# Altium PCB daboard.PcbDoc (part 2 of 2)
Units mil, origin at the board's own origin, x right, y up, seen from the top; angles counter-clockwise.
Board outline 3875 x 2400 mil, 2 copper layers (Top Layer, Bottom Layer); 197 components, 182 nets, 856 pads, 128 vias.
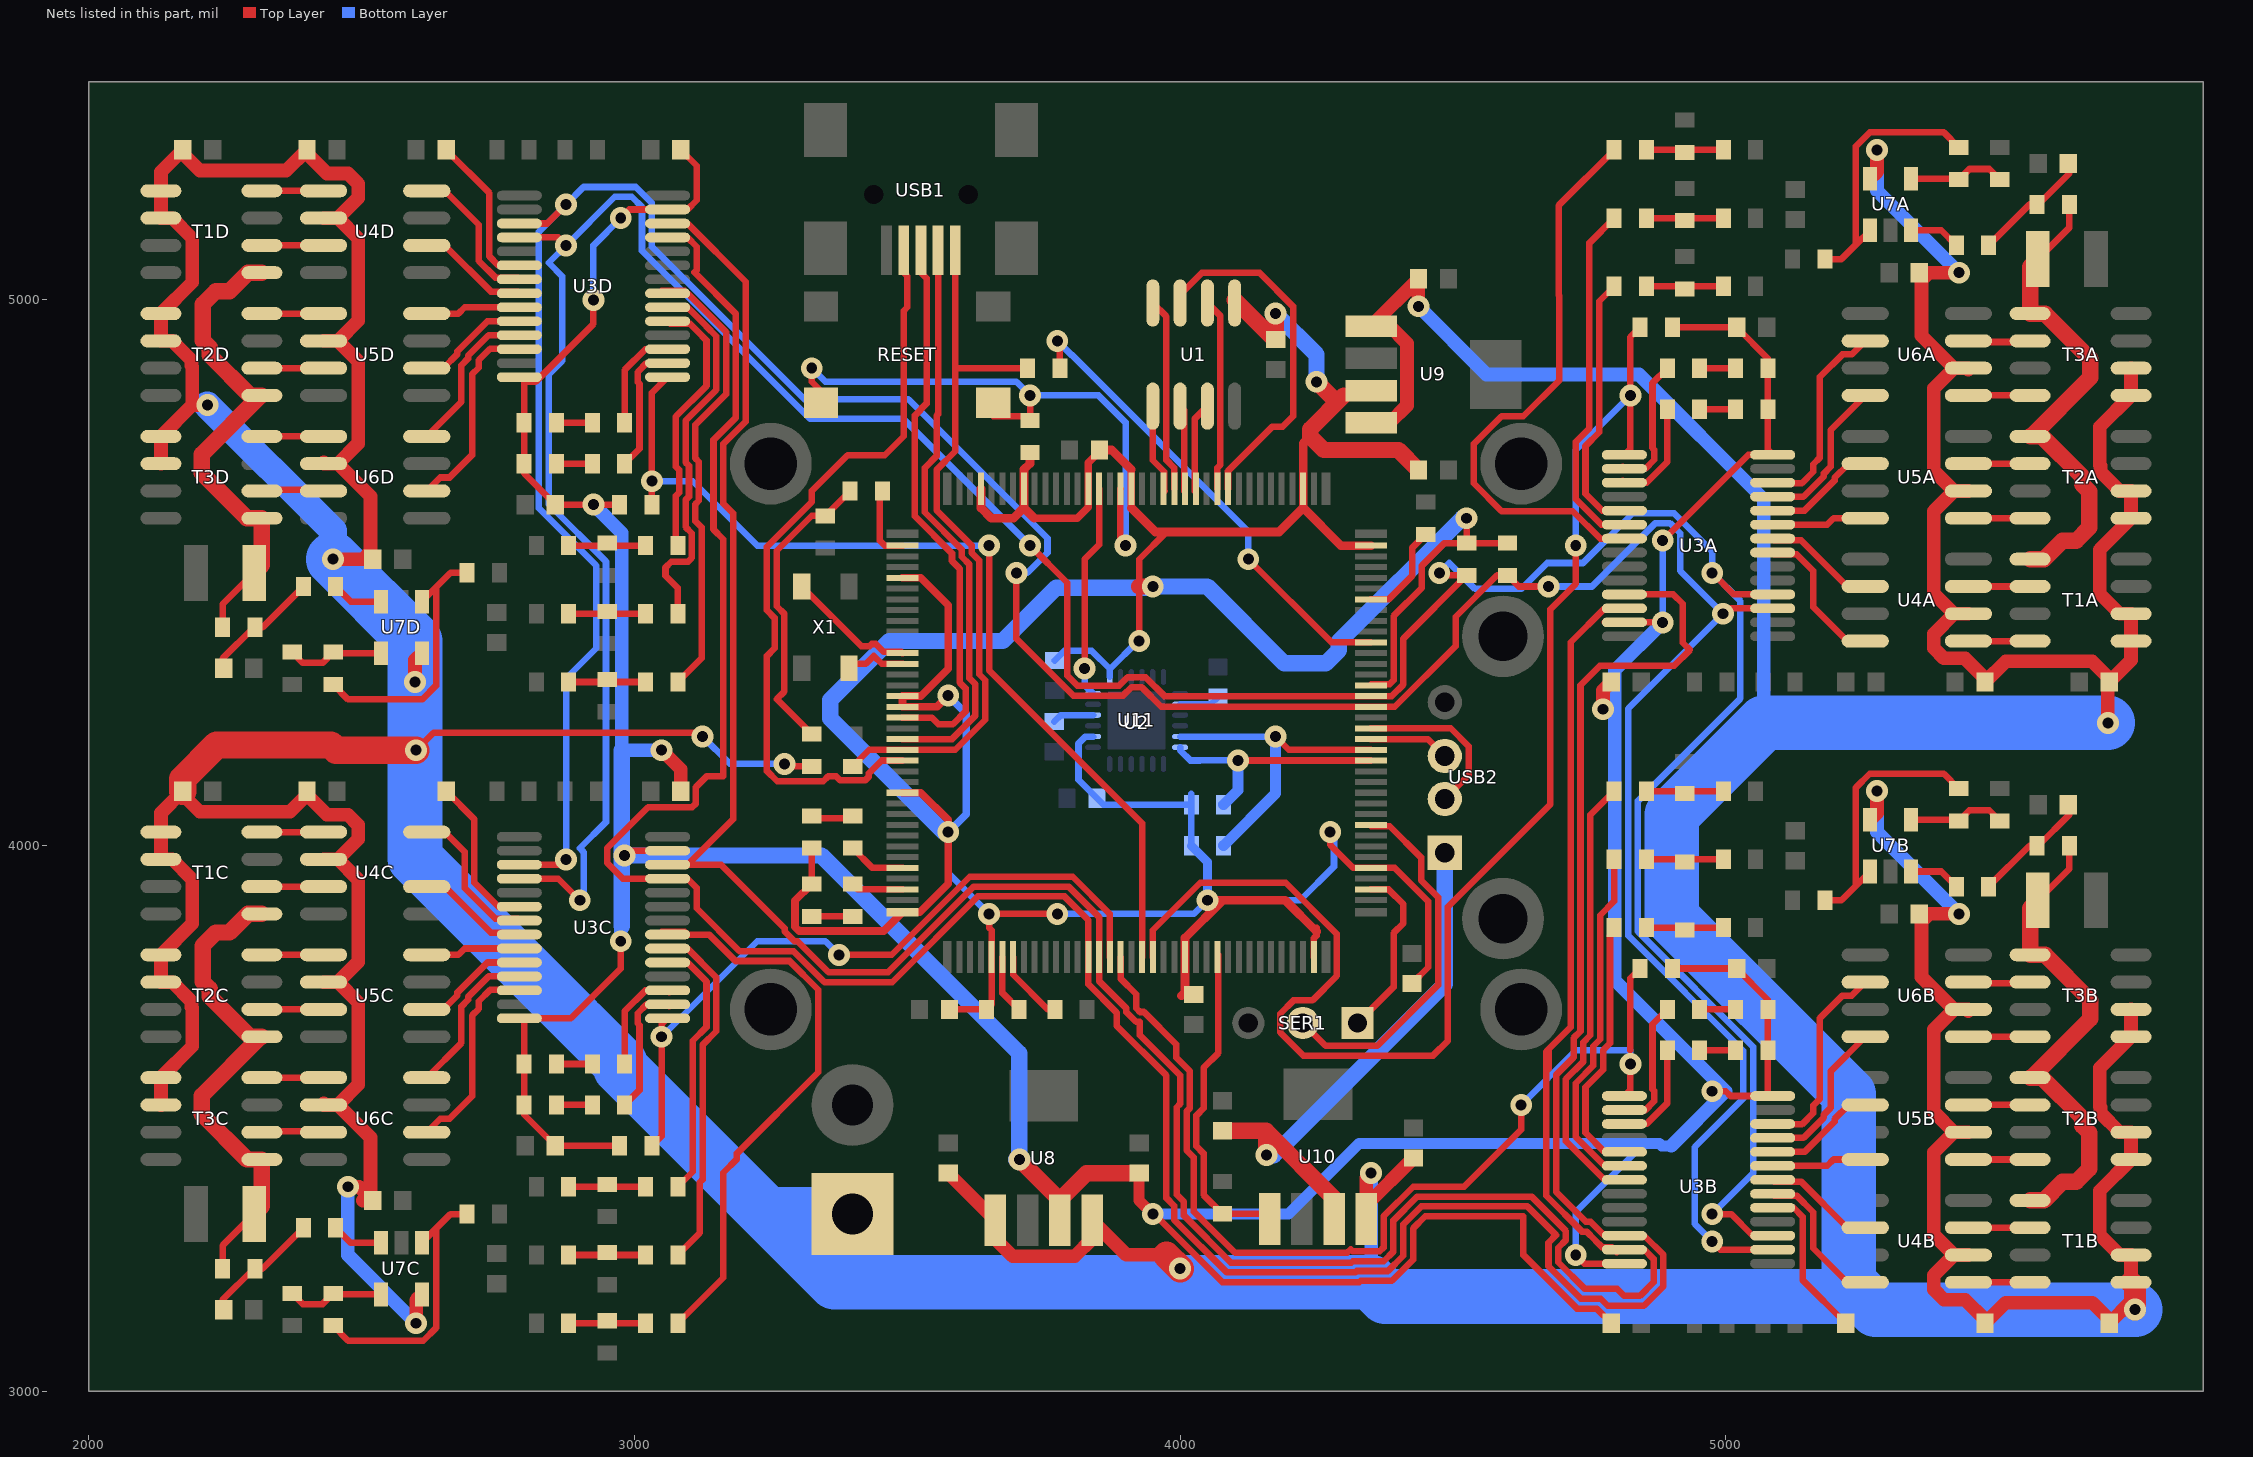
[diagram p2: the nets of this part, all layers, seen from the top]

## Via types
v1: diameter 40, hole 20, Top Layer to Bottom Layer, 127 vias
v2: diameter 50, hole 28, Top Layer to Bottom Layer, 1 vias

## Nets (pads, with @x,y where several pads share a name; then routed paths per layer and width w, separated by ;. In a path a pad name is that pad's centre, name@x,y a point inside that pad or via, vN(x,y) a via of type N, cw(c..) or ccw(c..) an arc to the next point about the centre after c; other vN are vias at no path point) (continued)
NetC2B_2: C2B.2 U3B.20 | length 289.7
  Top Layer w12: U3B.20@5085.83,3336.61 5124.34,3336.61 5140.66,3320.28 5140.66,3204.22 C2B.2@5219.88,3125
NetC2C_2: C2C.2 U3C.20 | length 289.7
  Top Layer w12: C2C.2@2655.12,4100 2707,4048.12 2707,3932.05 2750.66,3888.39 U3C.20@2789.17,3888.39
NetC2D_2: C2D.2 U3D.20 | length 289.7
  Top Layer w12: C2D.2@2655.12,5275 2734.34,5195.78 2734.34,5079.71 2750.67,5063.39 U3D.20@2789.17,5063.39
NetC11A_2: C11A.2 R26A.2 R28A.1 | length 220.7
  Top Layer w12: R28A.1@5481.5,5100 5556.5,5175 5572.44,5175 5629.53,5232.09 C11A.2@5629.53,5250
NetC11B_2: C11B.2 R26B.2 R28B.1 | length 220.7
  Top Layer w12: R28B.1@5481.5,3925 5556.5,4000 5572.44,4000 5629.53,4057.09 C11B.2@5629.53,4075
NetC11C_2: C11C.2 R26C.2 R28C.1 | length 220.7
  Top Layer w12: C11C.2@2245.47,3150 2245.47,3167.91 2302.56,3225 2318.5,3225 R28C.1@2393.5,3300
NetC11D_2: C11D.2 R26D.2 R28D.1 | length 220.7
  Top Layer w12: C11D.2@2245.47,4325 2245.47,4342.91 2302.56,4400 2318.51,4400 R28D.1@2393.51,4475
NetC24_2: C24.2 U11.10 | length 76
  Bottom Layer w12: C24.2@3769.49,4227.36 3781.5,4239.37 U11.10@3840.55,4239.37
NetC26_1: C26.1 U11.20 | length 75
  Bottom Layer w12: U11.20@4000,4259.05 4056.3,4259.05 C26.1@4069.49,4272.24
NetD1_2: D1.2 R2.1 | length 70.5
  Top Layer w12: D1.2@3329.53,4050 R2.1@3400,4050
NetD2_2: D2.2 R3.1 | length 75
  Top Layer w12: D2.2@3325,3870.47 R3.1@3400,3870.47
NetD3A_2: D3A.2 R14A.1 | length 65.9
  Top Layer w12: R14A.1@4951.97,4800 D3A.2@5017.92,4800
NetD3B_2: D3B.2 R14B.1 | length 65.9
  Top Layer w12: R14B.1@4951.97,3625 D3B.2@5017.91,3625
NetD3C_2: D3C.2 R14C.1 | length 65.9
  Top Layer w12: D3C.2@2857.09,3600 R14C.1@2923.03,3600
NetD3D_2: D3D.2 R14D.1 | length 65.9
  Top Layer w12: D3D.2@2857.09,4775 R14D.1@2923.03,4775
NetD4A_2: D4A.2 R15A.1 | length 65.9
  Top Layer w12: R15A.1@4951.97,4875 D4A.2@5017.92,4875
NetD4B_2: D4B.2 R15B.1 | length 65.9
  Top Layer w12: R15B.1@4951.97,3700 D4B.2@5017.91,3700
NetD4C_2: D4C.2 R15C.1 | length 65.9
  Top Layer w12: D4C.2@2857.09,3525 R15C.1@2923.03,3525
NetD4D_2: D4D.2 R15D.1 | length 65.9
  Top Layer w12: D4D.2@2857.09,4700 R15D.1@2923.03,4700
NetR2_2: R2.2 U2.32 | length 106.3
  Top Layer w12: R2.2@3400,3995.47 3436.22,3959.25 U2.32@3491.34,3959.25
NetR3_2: R3.2 U2.34 | length 95.3
  Top Layer w12: R3.2@3400,3929.53 3409.65,3919.88 U2.34@3491.34,3919.88
NetR4_2: R4.2 U2.98 | length 885.1
  Top Layer w12: v1(3775,4925) 3779.53,4920.47 R4.2@3779.53,4875 ; v1(4125,4525) 4277.36,4372.64 U2.98@4349.61,4372.64
  Bottom Layer w12: v1(3775,4925) 3800,4900 3800.91,4900 4125,4575.91 v1(4125,4525)
NetR5_2: R5.2 U2.102 | length 179.6
  Top Layer w12: U2.102@4349.61,4451.38 4381.93,4451.38 4425,4494.45 4425,4545.47 R5.2@4450,4570.47
NetR6_2: R6.2 R7.1 R10.2 | length 554
  Top Layer w12: R6.2@3325,4204.53 3260.94,4268.58 3275,4282.64 3275,4424.7 3260.94,4438.75 3260.94,4540.47 3325,4604.53 R7.1@3350,4604.53 R10.2@3395.47,4650
NetR8_2: R8.2 U2.42 | length 108.3
  Top Layer w12: U2.42@3674.41,3795.87 3674.41,3730.12 R8.2@3704.53,3700
NetR9_2: R9.2 U2.43 | length 135
  Top Layer w12: U2.43@3694.09,3795.87 3694.09,3763.54 3757.64,3700 R9.2@3770.47,3700
NetR10_1: R10.1 U2.2 | length 138.3
  Top Layer w12: R10.1@3454.53,4650 3449.81,4645.28 3449.81,4559.01 3459.01,4549.8 U2.2@3491.34,4549.8
NetR11A_2: R11A.2 U2.56 U3A.1 | length 2607.5
  Top Layer w12: U2.56@3950,3795.87 3950,3845.25 4036.75,3932 4193.46,3932 4287.2,3838.26 4287.2,3761.37 4242.36,3716.53 4207.8,3716.53 4183.47,3692.2 4183.47,3657.8 4225.8,3615.47 4463.62,3615.47 4490.72,3642.56 4490.72,3888.08 4678.54,4075.9 4678.54,4433.28 4725,4479.75 v1(4725,4550) ; U3A.1@4814.17,4716.34 4825,4727.16 v1(4825,4825) 4825,4932.08 R11A.2@4842.92,4950
  Bottom Layer w12: v1(4725,4550) 4725,4725 v1(4825,4825)
NetR11B_2: R11B.2 U2.53 U3B.1 | length 1824.6
  Top Layer w12: U2.53@3890.95,3795.87 3890.95,3756.51 3919.69,3727.76 3919.69,3702.31 3926.72,3695.28 3933.62,3695.28 3993,3635.91 3993,3611.75 4018,3586.75 4018,3519.34 4011.85,3513.19 4011.85,3441.93 4025,3428.77 4025,3329.68 4100.68,3254 4306.01,3254 4312.6,3260.59 4316.49,3256.7 4365.8,3256.7 4372.83,3263.73 4372.83,3320.82 4427.01,3375 4520.25,3375 4625,3479.75 v1(4625,3525) ; U3B.1@4814.17,3541.34 4825,3552.16 v1(4825,3600) ; 4825,3625 4825,3757.08 R11B.2@4842.91,3775
  Bottom Layer w12: v1(4625,3525) 4725,3625 4825,3625 v1(4825,3600)
NetR11C_2: R11C.2 U2.52 U3C.1 | length 1316.1
  Top Layer w12: R11C.2@3032.09,3450 3050,3467.92 v1(3050,3650) 3050,3672.84 U3C.1@3060.83,3683.66 ; v1(3375,3800) 3471.43,3800 3614.43,3943 3803.17,3943 3871.26,3874.91 U2.52@3871.26,3795.87
  Bottom Layer w12: v1(3050,3650) 3225,3825 3350,3825 v1(3375,3800)
NetR11D_2: R11D.2 U2.55 U3D.1 | length 1782.6
  Top Layer w12: R11D.2@3032.09,4625 v1(3032.09,4667.91) 3032.09,4829.92 U3D.1@3060.83,4858.66 ; v1(3650,4550) 3650,4321.62 3930.32,4041.31 U2.55@3930.32,3795.87
  Bottom Layer w12: v1(3032.09,4667.91) 3107.09,4667.91 3225,4550 v1(3650,4550)
NetR14A_2: R14A.2 U3A.3 | length 195.8
  Top Layer w12: U3A.3@4810.94,4668.39 U3A.3@4814.17,4665.16 4854.67,4665.16 4892.92,4703.4 R14A.2@4892.92,4800
NetR14B_2: R14B.2 U3B.3 | length 195.8
  Top Layer w12: U3B.3@4810.94,3493.39 U3B.3@4814.17,3490.16 4854.67,3490.16 4892.92,3528.4 R14B.2@4892.91,3625
NetR14C_2: R14C.2 U3C.3 | length 195.8
  Top Layer w12: R14C.2@2982.09,3600 2982.08,3696.6 3020.33,3734.84 U3C.3@3060.83,3734.84 U3C.3@3064.06,3731.61
NetR14D_2: R14D.2 U3D.3 | length 195.8
  Top Layer w12: R14D.2@2982.09,4775 2982.09,4871.6 3020.33,4909.84 U3D.3@3060.83,4909.84 U3D.3@3064.06,4906.61
NetR15A_2: R15A.2 U3A.2 | length 246.8
  Top Layer w12: U3A.2@4810.94,4693.98 U3A.2@4814.17,4690.75 4852.68,4690.75 4869.01,4707.08 4869.01,4725.6 4865.64,4728.98 4865.64,4847.72 R15A.2@4892.92,4875
NetR15B_2: R15B.2 U3B.2 | length 246.8
  Top Layer w12: U3B.2@4810.94,3518.98 U3B.2@4814.17,3515.75 4852.68,3515.75 4869.01,3532.08 4869.01,3550.6 4865.64,3553.98 4865.64,3672.72 R15B.2@4892.91,3700
NetR15C_2: R15C.2 U3C.2 | length 246.8
  Top Layer w12: R15C.2@2982.09,3525 3009.36,3552.28 3009.36,3671.02 3005.99,3674.4 3005.99,3692.92 3022.32,3709.25 U3C.2@3060.83,3709.25 U3C.2@3064.06,3706.02
NetR15D_2: R15D.2 U3D.2 | length 246.8
  Top Layer w12: R15D.2@2982.09,4700 3009.36,4727.28 3009.36,4846.02 3005.99,4849.4 3005.99,4867.92 3022.32,4884.25 U3D.2@3060.83,4884.25 U3D.2@3064.06,4881.02
NetR16A_1: R16A.1 U3A.5 | length 486.1
  Top Layer w12: R16A.1@4795.47,5025 4768,4997.53 4768,4757.6 4742.84,4732.43 4742.84,4644.82 4773.68,4613.98 U3A.5@4814.17,4613.98
NetR16A_2: R16A.2 R17A.2 R18A.1 | length 140.9
  Top Layer w12: R16A.2@4854.53,5025 R18A.1@4995.47,5025
NetR16B_1: R16B.1 U3B.5 | length 483.7
  Top Layer w12: R16B.1@4795.47,3850 4795.47,3843.19 4787.69,3835.41 4787.69,3637.83 4775,3625.14 4775,3589.6 4742.83,3557.43 4742.83,3473.93 4777.79,3438.98 U3B.5@4814.17,3438.98
NetR16B_2: R16B.2 R17B.2 R18B.1 | length 140.9
  Top Layer w12: R16B.2@4854.53,3850 R18B.1@4995.47,3850
NetR16C_1: R16C.1 U3C.5 | length 483.7
  Top Layer w12: U3C.5@3060.83,3786.02 3097.21,3786.02 3132.17,3751.07 3132.17,3667.57 3107,3642.4 3107,3402.47 R16C.1@3079.53,3375
NetR16C_2: R16C.2 R17C.2 R18C.1 | length 140.9
  Top Layer w12: R18C.1@2879.53,3375 R16C.2@3020.47,3375
NetR16D_1: R16D.1 U3D.5 | length 493.9
  Top Layer w12: U3D.5@3060.83,4961.02 3065.56,4956.29 3101.95,4956.29 3114.17,4944.07 3114.17,4943.94 3132.17,4925.94 3132.17,4842.57 3075.87,4786.27 3075.87,4694.84 3082.09,4688.62 3082.09,4647.2 3075.87,4640.98 3075.87,4558.6 3082,4552.47 R16D.1@3079.53,4550
NetR16D_2: R16D.2 R17D.2 R18D.1 | length 140.9
  Top Layer w12: R18D.1@2879.53,4550 R16D.2@3020.47,4550
NetR19A_1: R19A.1 U3A.6 | length 652.8
  Top Layer w12: R19A.1@4795.47,5150 4750,5104.53 4750,4765.05 4724.84,4739.89 4724.84,4635.24 4771.69,4588.39 U3A.6@4814.17,4588.39
NetR19A_2: R19A.2 R20A.2 R21A.1 | length 140.9
  Top Layer w12: R19A.2@4854.53,5150 R21A.1@4995.47,5150
NetR19B_1: R19B.1 U3B.6 | length 649.2
  Top Layer w12: R19B.1@4795.47,3975 4795.47,3898.47 4769.69,3872.69 4769.69,3645.29 4757,3632.6 4757,3597.05 4724.83,3564.89 4724.83,3466.34 4777.78,3413.39 U3B.6@4814.17,3413.39
NetR19B_2: R19B.2 R20B.2 R21B.1 | length 140.9
  Top Layer w12: R19B.2@4854.53,3975 R21B.1@4995.47,3975
NetR19C_1: R19C.1 U3C.6 | length 649.2
  Top Layer w12: U3C.6@3060.83,3811.61 3097.22,3811.61 3150.17,3758.66 3150.17,3660.11 3125,3634.95 3125,3388.14 3120,3383.14 3120,3290.47 R19C.1@3079.53,3250
NetR19C_2: R19C.2 R20C.2 R21C.1 | length 140.9
  Top Layer w12: R21C.1@2879.53,3250 R19C.2@3020.47,3250
NetR19D_1: R19D.1 U3D.6 | length 700.5
  Top Layer w12: U3D.6@3060.83,4986.61 3097.22,4986.61 3132.17,4951.66 3132.17,4951.39 3150.17,4933.39 3150.17,4835.11 3093.87,4778.81 3093.87,4702.3 3100.09,4696.08 3100.09,4639.75 3093.87,4633.53 3093.87,4584.13 3105.31,4572.69 3105.31,4527.31 3098.28,4520.28 3067.54,4520.28 3057,4509.74 3057,4494.83 3079.53,4472.3 R19D.1@3079.53,4425
NetR19D_2: R19D.2 R20D.2 R21D.1 | length 140.9
  Top Layer w12: R21D.1@2879.53,4425 R19D.2@3020.47,4425
NetR22A_1: R22A.1 U3A.7 | length 1060.4
  Top Layer w12: R22A.1@4795.47,5275 4693.47,5173 4693.47,5008.96 4694.97,5007.46 4694.97,4967.54 4694.97,4853 4628.97,4787 4588.96,4787 4538,4736.04 4538,4663.96 4588.96,4613 4719.5,4613 4769.71,4562.8 U3A.7@4814.17,4562.8
NetR22A_2: R22A.2 R23A.1 R24A.1 | length 140.9
  Top Layer w12: R22A.2@4854.53,5275 R24A.1@4995.47,5275
NetR22B_1: R22B.1 U3B.7 | length 814.7
  Top Layer w12: R22B.1@4795.47,4100 4751.69,4056.22 4751.69,3652.74 4739,3640.05 4739,3604.51 4706.83,3572.35 4706.83,3458.75 4777.79,3387.79 U3B.7@4814.17,3387.79
NetR22B_2: R22B.2 R23B.1 R24B.1 | length 140.9
  Top Layer w12: R22B.2@4854.53,4100 R24B.1@4995.47,4100
NetR22C_1: R22C.1 U3C.7 | length 1078.2
  Top Layer w12: U3C.7@3050,3841.94 U3C.7@3092.48,3841.94 ; U3C.7@3060.83,3837.21 3136.88,3837.21 3185.4,3788.69 3284.34,3788.69 3337,3736.04 3337,3585.04 3188,3436.04 3188,3425.68 3163,3400.68 3163,3208.47 R22C.1@3079.53,3125
NetR22C_2: R22C.2 R23C.1 R24C.1 | length 140.9
  Top Layer w12: R24C.1@2879.53,3125 R22C.2@3020.47,3125
NetR22D_1: R22D.1 U3D.7 | length 871.8
  Top Layer w12: U3D.7@3050,5016.94 U3D.7@3092.48,5016.94 ; U3D.7@3060.83,5012.2 3097.22,5012.2 3168.17,4941.25 3168.17,4827.65 3111.87,4771.35 3111.87,4709.76 3118.09,4703.54 3118.09,4632.29 3111.87,4626.07 3111.87,4594.5 3123.31,4583.06 3123.31,4343.78 R22D.1@3079.53,4300
NetR22D_2: R22D.2 R23D.1 R24D.1 | length 140.9
  Top Layer w12: R24D.1@2879.53,4300 R22D.2@3020.47,4300
NetR25A_2: R25A.2 R26A.1 T1A.1 T2A.1 T3A.1 | length 918.8
  Top Layer w12: R25A.2@5571.85,5075 5629.53,5132.68 R26A.1@5629.53,5175
  Top Layer w30: T1A.1@5557.48,4525 5582.98,4525 5616.98,4559 5641.98,4559 5666,4583.02 5666,4649.15 5653.12,4662.04 5653.12,4676.36 5579.47,4750 T2A.1@5559.95,4750 ; T2A.1@5557.48,4750 T2A.1@5559.95,4750 ; R25A.2@5571.85,5075 5557.48,5060.63 T3A.1@5557.48,4975 5584.95,4975 5667.97,4891.98 5667.97,4858.02 T2A.1@5559.95,4750
NetR25B_2: R25B.2 R26B.1 T1B.1 T2B.1 T3B.1 | length 918.8
  Top Layer w12: R25B.2@5571.85,3900 5629.53,3957.68 R26B.1@5629.53,4000
  Top Layer w30: T1B.1@5557.48,3350 5582.98,3350 5616.98,3384 5641.98,3384 5666,3408.02 5666,3474.15 5653.12,3487.04 5653.12,3501.36 5579.47,3575 T2B.1@5559.95,3575 ; T2B.1@5557.48,3575 T2B.1@5559.95,3575 ; R25B.2@5571.85,3900 5557.48,3885.63 T3B.1@5557.48,3800 5584.95,3800 5667.97,3716.98 5667.97,3683.02 T2B.1@5559.95,3575
NetR25C_2: R25C.2 R26C.1 T1C.1 T2C.1 T3C.1 | length 918.8
  Top Layer w12: R26C.1@2245.47,3225 2245.47,3267.32 R25C.2@2303.15,3325
  Top Layer w30: R25C.2@2303.15,3325 2317.52,3339.37 T3C.1@2317.52,3425 2290.05,3425 2207.03,3508.02 2207.03,3541.98 T2C.1@2315.05,3650 ; T2C.1@2317.52,3650 T2C.1@2315.05,3650 ; T1C.1@2317.52,3875 2292.02,3875 2258.02,3841 2233.02,3841 2209,3816.98 2209,3750.85 2221.88,3737.96 2221.88,3723.64 2295.53,3650 T2C.1@2315.05,3650
NetR25D_2: R25D.2 R26D.1 T1D.1 T2D.1 T3D.1 | length 918.8
  Top Layer w12: R26D.1@2245.47,4400 2245.47,4442.32 R25D.2@2303.15,4500
  Top Layer w30: R25D.2@2303.15,4500 2317.52,4514.37 T3D.1@2317.52,4600 2290.05,4600 2207.03,4683.02 2207.03,4716.98 T2D.1@2315.05,4825 ; T2D.1@2317.52,4825 T2D.1@2315.05,4825 ; T1D.1@2317.52,5050 2292.02,5050 2258.02,5016 2233.02,5016 2209,4991.98 2209,4925.85 2221.88,4912.96 2221.88,4898.64 2295.53,4825 T2D.1@2315.05,4825
NetR27A_2: R27A.2 R29A.1 U7A.4 | length 179.5
  Top Layer w12: U7A.4@5339.37,5222.25 5425.2,5222.25 R29A.1@5426.97,5220.47 5446.47,5239.97 5482.47,5239.97 R27A.2@5501.97,5220.47
NetR27B_2: R27B.2 R29B.1 U7B.4 | length 179.5
  Top Layer w12: U7B.4@5339.37,4047.24 5425.2,4047.25 R29B.1@5426.97,4045.47 5446.47,4064.97 5482.47,4064.97 R27B.2@5501.97,4045.47
NetR27C_2: R27C.2 R29C.1 U7C.4 | length 179.5
  Top Layer w12: R27C.2@2373.03,3179.53 2392.53,3160.03 2428.53,3160.03 R29C.1@2448.03,3179.53 2449.8,3177.75 U7C.4@2535.63,3177.76
NetR27D_2: R27D.2 R29D.1 U7D.4 | length 179.5
  Top Layer w12: R27D.2@2373.03,4354.53 2392.53,4335.03 2428.53,4335.03 R29D.1@2448.03,4354.53 2449.81,4352.75 U7D.4@2535.63,4352.76
NetR28A_2: R28A.2 U7A.3 | length 98.5
  Top Layer w12: U7A.3@5342.13,5125 U7A.3@5339.37,5127.76 5394.69,5127.76 R28A.2@5422.44,5100
NetR28B_2: R28B.2 U7B.3 | length 98.5
  Top Layer w12: U7B.3@5342.13,3950 U7B.3@5339.37,3952.76 5394.69,3952.76 R28B.2@5422.44,3925
NetR28C_2: R28C.2 U7C.3 | length 98.5
  Top Layer w12: R28C.2@2452.56,3300 2480.31,3272.24 U7C.3@2535.63,3272.24 U7C.3@2532.87,3275
NetR28D_2: R28D.2 U7D.3 | length 98.5
  Top Layer w12: R28D.2@2452.56,4475 2480.32,4447.24 U7D.3@2535.63,4447.24 U7D.3@2532.87,4450
NetR29A_2: R29A.2 R30A.1 U7A.1 | length 495.6
  Top Layer w12: R30A.1@5181.5,5075 5211.81,5075 5238.27,5101.46 ; U7A.1@5264.57,5127.76 5238.27,5101.46 ; R29A.2@5426.97,5279.53 5399.5,5307 5263.72,5307 5238.27,5281.56 5238.27,5101.46
NetR29B_2: R29B.2 R30B.1 U7B.1 | length 495.6
  Top Layer w12: R30B.1@5181.5,3900 5211.81,3900 5238.27,3926.46 ; U7B.1@5264.57,3952.76 5238.27,3926.46 ; R29B.2@5426.97,4104.53 5399.5,4132 5263.72,4132 5238.27,4106.56 5238.27,3926.46
NetR29C_2: R29C.2 R30C.1 U7C.1 | length 496.8
  Top Layer w12: R29C.2@2448.03,3120.47 2475.5,3093 2613.25,3093 2636.73,3116.47 2636.73,3298.54 ; U7C.1@2610.43,3272.24 2636.73,3298.54 ; R30C.1@2693.5,3325 2663.19,3325 2636.73,3298.54
NetR29D_2: R29D.2 R30D.1 U7D.1 | length 495.6
  Top Layer w12: R29D.2@2448.03,4295.47 2475.51,4268 2611.29,4268 2636.73,4293.44 2636.73,4473.54 ; U7D.1@2610.43,4447.24 2636.73,4473.54 ; R30D.1@2693.5,4500 2663.19,4500 2636.73,4473.54
NetR31_2: R31.2 U2.62 U10.1 | length 601.3
  Top Layer w12: U2.62@4070.28,3800 4070.28,3620.28 4043,3593 4043,3518.89 4029.85,3505.73 4029.85,3449.38 4043,3436.23 4043,3360.15 R31.2@4077.56,3325.59 4154.33,3325.59 U10.1@4163.98,3315.94
NetR32_1: R32.1 U2.87 U11.24 | length 455.6
  Top Layer w12: v1(4106.1,4156.1) U2.87@4349.61,4156.1
  Bottom Layer w12: U11.24@4000,4180.31 4000,4175 4018.9,4156.1 4035.85,4156.1 4036.75,4157 4105.2,4157 v1(4106.1,4156.1)
  Bottom Layer w20: R32.1@4079.53,4075 4106.1,4101.57 v1(4106.1,4156.1)
NetR33_1: R33.1 U2.88 U11.23 | length 599.2
  Top Layer w12: v1(4175,4200) 4199.21,4175.79 U2.88@4349.61,4175.79
  Bottom Layer w12: U11.23@4000,4200 v1(4175,4200)
  Bottom Layer w20: R33.1@4079.53,4000 4175,4095.47 v1(4175,4200)
NetR34_1: R34.1 U2.92 U3A.17 U3B.17 U3C.17 U3D.17 | length 6153.4
  Top Layer w12: U3C.17@2789.17,3965.16 2865.16,3965.16 v1(2875,3975) ; U3D.17@2789.17,5140.16 2840.16,5140.16 v1(2875,5175) ; v1(3700,4500) 3700,4379.29 3804.29,4275 3895.49,4275 3911.23,4290.74 3929.32,4290.74 3965.54,4254.53 U2.92@4349.61,4254.53 4393.47,4254.53 4504.93,4365.98 4504.93,4419.62 4580.78,4495.47 R34.1@4600,4495.47 4620.47,4475 v1(4675,4475) ; v1(4975,3275) 4990.16,3259.84 U3B.17@5085.83,3259.84 ; v1(4994.68,4425) 4984.84,4434.84 U3A.17@5085.83,4434.84
  Bottom Layer w12: v1(2875,3975) 2875,4306.71 2930.03,4361.74 2930.03,4513.25 2825,4618.28 2825,5125 v1(2875,5175) 2907,5207 3002.71,5207 3032,5177.71 3032,5097.74 3311.75,4818 3502.25,4818 3757,4563.25 3757,4536.75 3720.25,4500 v1(3700,4500) ; v1(4675,4475) 4754.75,4475 4871,4591.25 4897.51,4591.25 4916.25,4572.51 4916.25,4503.43 v1(4994.68,4425) 4820.97,4251.29 4820.97,3835.38 5032,3624.35 5032,3536.75 4943,3447.75 4943,3307 v1(4975,3275)
NetR35_1: R35.1 U2.93 U3A.18 U3B.18 U3C.18 U3D.18 | length 6240.3
  Top Layer w12: U3C.18@2789.17,3939.57 2860.43,3939.57 v1(2900,3900) ; U3D.18@2789.17,5114.57 2860.43,5114.57 v1(2875,5100) ; v1(3725,4550) 3793,4482 3793,4311.75 3811.75,4293 3888.03,4293 3903.77,4308.74 3936.78,4308.74 3971.31,4274.21 U2.93@4349.61,4274.21 4387.7,4274.21 4409.13,4295.64 4409.13,4379.61 R35.1@4525,4495.47 4479.53,4495.47 v1(4475,4500) ; v1(4975,3325) 5009.87,3325 5049.44,3285.43 U3B.18@5085.83,3285.43 ; v1(4975,4500) 5014.57,4460.43 U3A.18@5085.83,4460.43
  Bottom Layer w12: v1(2900,3900) 2907,3907 2907,3988.25 2900,3995.25 2948.03,4043.29 2948.03,4520.71 2843,4625.74 2843,4863.25 2868,4888.25 2868,5043 2843,5068 v1(2875,5100) 2964,5189 2995.26,5189 3014,5170.25 3014,5090.29 3322.29,4782 3493,4782 v1(3725,4550) ; v1(4475,4500) 4493,4518 4540.53,4470.47 4625.21,4470.47 4672.75,4518 4738.25,4518 4829.51,4609.25 4904.96,4609.25 4975,4539.21 v1(4975,4500) 5026.68,4448.32 5026.68,4269.88 4838.97,4082.16 4838.97,3842.84 5050,3631.81 5050,3400 v1(4975,3325)
NetR36_1: R36.1 RESET.1 RESET.2 U2.128 | length 1151.2
  Top Layer w12: v1(3325,4875) 3325,4850 3342.06,4832.94 3342.06,4807.94 RESET.2@3350,4800 ; RESET.1@3657.42,4786.65 3717.88,4786.65 R36.1@3725,4779.53 v1(3725,4825) ; U2.128@3890.95,4654.13 3890.63,4653.82 3890.63,4559.37 v1(3900,4550)
  Bottom Layer w12: v1(3325,4875) 3350,4850 3700,4850 v1(3725,4825) 3850.46,4825 3900,4775.46 v1(3900,4550)
NetSER1_1: SER1.1 U2.75 | length 323.3
  Top Layer w12: SER1.1@4325,3675 4391.13,3741.13 4391.13,3839.85 4409.13,3857.85 4409.13,3892.68 4381.93,3919.88 U2.75@4349.61,3919.88
NetSER1_2: SER1.2 U2.81 | length 672.9
  Top Layer w12: SER1.2@4225,3675 4266.53,3633.47 4361.47,3633.47 4472.72,3744.72 4472.72,3905.46 4441.54,3936.64 4441.54,3978.38 4384.1,4035.82 U2.81@4350,4035.82
NetT1A_2: T1A.2 U4A.7 | length 113
  Top Layer w12: U4A.7@5444.49,4475 T1A.2@5557.48,4475
NetT1A_4: T1A.4 U4A.5 | length 113
  Top Layer w12: U4A.5@5444.49,4375 T1A.4@5557.48,4375
NetT1B_2: T1B.2 U4B.7 | length 113
  Top Layer w12: U4B.7@5444.49,3300 T1B.2@5557.48,3300
NetT1B_4: T1B.4 U4B.5 | length 113
  Top Layer w12: U4B.5@5444.49,3200 T1B.4@5557.48,3200
NetT1C_2: T1C.2 U4C.7 | length 113
  Top Layer w12: T1C.2@2317.52,3925 U4C.7@2430.51,3925
NetT1C_4: T1C.4 U4C.5 | length 113
  Top Layer w12: T1C.4@2317.52,4025 U4C.5@2430.51,4025
NetT1D_2: T1D.2 U4D.7 | length 113
  Top Layer w12: T1D.2@2317.52,5100 U4D.7@2430.51,5100
NetT1D_4: T1D.4 U4D.5 | length 113
  Top Layer w12: T1D.4@2317.52,5200 U4D.5@2430.51,5200
NetT2A_2: T2A.2 U5A.7 | length 113
  Top Layer w12: U5A.7@5444.49,4700 T2A.2@5557.48,4700
NetT2A_4: T2A.4 U5A.5 | length 113
  Top Layer w12: U5A.5@5444.49,4600 T2A.4@5557.48,4600
NetT2B_2: T2B.2 U5B.7 | length 113
  Top Layer w12: U5B.7@5444.49,3525 T2B.2@5557.48,3525
NetT2B_4: T2B.4 U5B.5 | length 113
  Top Layer w12: U5B.5@5444.49,3425 T2B.4@5557.48,3425
NetT2C_2: T2C.2 U5C.7 | length 113
  Top Layer w12: T2C.2@2317.52,3700 U5C.7@2430.51,3700
NetT2C_4: T2C.4 U5C.5 | length 113
  Top Layer w12: T2C.4@2317.52,3800 U5C.5@2430.51,3800
NetT2D_2: T2D.2 U5D.7 | length 113
  Top Layer w12: T2D.2@2317.52,4875 U5D.7@2430.51,4875
NetT2D_4: T2D.4 U5D.5 | length 113
  Top Layer w12: T2D.4@2317.52,4975 U5D.5@2430.51,4975
NetT3A_2: T3A.2 U6A.7 | length 114.6
  Top Layer w12: U6A.7@5444.49,4925 5446.49,4923 5555.48,4923 T3A.2@5557.48,4925
NetT3A_4: T3A.4 U6A.5 | length 113
  Top Layer w12: U6A.5@5444.49,4825 T3A.4@5557.48,4825
NetT3B_2: T3B.2 U6B.7 | length 114.6
  Top Layer w12: U6B.7@5444.49,3750 5446.49,3748 5555.48,3748 T3B.2@5557.48,3750
NetT3B_4: T3B.4 U6B.5 | length 113
  Top Layer w12: U6B.5@5444.49,3650 T3B.4@5557.48,3650
NetT3C_2: T3C.2 U6C.7 | length 114.6
  Top Layer w12: T3C.2@2317.52,3475 2319.52,3477 2428.51,3477 U6C.7@2430.51,3475
NetT3C_4: T3C.4 U6C.5 | length 113
  Top Layer w12: T3C.4@2317.52,3575 U6C.5@2430.51,3575
NetT3D_2: T3D.2 U6D.7 | length 114.6
  Top Layer w12: T3D.2@2317.52,4650 2319.52,4652 2428.51,4652 U6D.7@2430.51,4650
NetT3D_4: T3D.4 U6D.5 | length 113
  Top Layer w12: T3D.4@2317.52,4750 U6D.5@2430.51,4750
NetU1_1: U1.1 U2.124 | length 164.4
  Top Layer w12: U1.1@3950,4805.51 3950,4706.14 3970.88,4685.26 3970.88,4650.49 U2.124@3971.37,4650
NetU1_2: U1.2 U2.122 | length 158.6
  Top Layer w12: U1.2@4000,4805.51 4007.37,4798.14 U2.122@4007.37,4650
NetU1_3: U1.3 U2.121 | length 165.2
  Top Layer w12: U2.121@4026.57,4650 4026.57,4782.08 U1.3@4050,4805.51
NetU1_6: U1.6 U2.119 | length 352.6
  Top Layer w12: U1.6@4050,4994.49 4073.81,4970.68 4073.81,4697.93 4068.11,4692.23 U2.119@4068.11,4654.13
NetU1_7: U1.7 U2.118 | length 658.9
  Top Layer w12: U1.7@4000,4994.49 4000,5009.66 4040.14,5049.79 4145.46,5049.79 4207,4988.25 4207,4786.75 4188.25,4768 4169.34,4768 4087.8,4686.46 U2.118@4087.8,4654.13
NetU1_8: U1.8 U2.123 | length 356.7
  Top Layer w12: U1.8@3950,4994.49 3975,4969.49 3975,4706.6 3988.88,4692.72 3988.88,4671.89 3989.37,4671.4 U2.123@3989.37,4654.13
NetU2_12: U2.12 X1.3 | length 238.4
  Top Layer w12: X1.3@3306.69,4474.8 3415.78,4365.71 3431.34,4365.71 3435.28,4369.65 3442.32,4369.65 3456.84,4355.13 3489.16,4355.13 U2.12@3491.34,4352.95
NetU2_13: U2.13 X1.1 | length 113.3
  Top Layer w12: X1.1@3393.31,4325.2 3401.38,4333.27 3424.35,4333.27 3438.8,4347.71 3453.24,4333.27 U2.13@3491.34,4333.27
NetU2_18: U2.18 USB1.3 | length 1027.3
  Top Layer w12: U2.18@3491.34,4234.84 3544.9,4234.84 3557.22,4222.53 3583.73,4222.53 3607,4245.8 3607,4288.25 3596,4299.25 3596,4507.83 3582,4521.83 3582,4535.56 3514,4603.56 3514,4788.54 3535.5,4810.05 3535.5,5039.85 3525,5050.35 USB1.3@3525,5090.94
NetU2_20: U2.20 USB1.2 | length 1052.7
  Top Layer w12: U2.20@3491.34,4195.47 3582.13,4195.47 3625,4238.35 3625,4295.71 3614,4306.71 3614,4515.29 3600,4529.29 3600,4543.02 3532,4611.02 3532,4692.34 3553.75,4714.09 3553.75,4788.19 3556.5,4790.94 USB1.2@3556.5,5090.94
NetU2_22: U2.22 USB1.4 | length 1396.4
  Top Layer w12: U2.22@3491.34,4156.1 3453.24,4156.1 3429.72,4132.58 3429.72,4126.72 3422.69,4119.69 3377.31,4119.69 3369.96,4127.05 3355.04,4127.05 3345.99,4118 3261.75,4118 3242.94,4136.8 3242.94,4347.69 3257,4361.75 3257,4417.24 3242.94,4431.3 3242.94,4547.93 3325.32,4630.31 3325.32,4650.32 3390.67,4715.67 3458.82,4715.67 3493.51,4750.35 3493.51,4979.99 3500,4986.49 3500,5043.86 3493.51,5050.35 USB1.4@3493.51,5090.94
NetU2_50: U2.50 U3A.11 U3B.11 U3C.11 U3D.11 | length 5935.3
  Top Layer w12: U3D.11@3060.83,5114.57 3097.22,5114.57 3114.17,5097.62 3114.17,5054.75 3110.01,5050.59 3186.17,4974.44 3186.17,4784.66 3145,4743.49 3145,4579.54 3163,4561.54 3163,4127.53 3132.86,4127.53 3112.79,4107.46 3112.79,4077.31 3105.76,4070.28 3025.03,4070.28 2950,3995.25 2950,3968.75 2979.18,3939.57 U3C.11@3060.83,3939.57 3097.21,3939.57 3114.17,3922.62 3114.17,3885.38 3192.85,3806.69 3291.8,3806.69 3348.49,3750 3472.35,3750 3629.35,3907 3788.25,3907 3831.89,3863.36 U2.50@3831.89,3795.87 3831.89,3746.1 3883.69,3694.3 3883.69,3670.14 3975,3578.83 3975,3354.23 3989,3340.23 3989,3314.77 4085.77,3218 4320.92,3218 4323.62,3220.7 4380.71,3220.7 4408.83,3248.82 4408.83,3305.91 4441.92,3339 4636.46,3339 4689,3286.46 4675,3272.46 4675,3229.29 4734.49,3169.8 4770.61,3169.8 4783.42,3157 4849.95,3157 4885.51,3192.57 4885.51,3250.48 4850.56,3285.43 U3B.11@4814.17,3285.43 4777.79,3285.43 4752.22,3311 4743.75,3311 4688.83,3365.91 4688.83,3579.8 4721,3611.97 4721,3647.51 4733.69,3660.2 4733.69,4294.17 4769.24,4329.72 4905.17,4329.72 4934.25,4358.8 4921,4372.05 4921,4443.21 4903.78,4460.43 U3A.11@4814.17,4460.43
NetU2_51: U2.51 U3A.12 U3B.12 U3C.12 U3D.12 | length 5485.7
  Top Layer w12: U3C.12@3060.83,3965.16 U3C.12@3097.21,3965.16 ; U3D.12@3060.83,5140.16 3097.22,5140.16 3204.17,5033.21 3204.17,4777.2 3163,4736.04 3163,4626.96 3181,4608.96 3181,4048.94 U3C.12@3097.21,3965.16 ; 4675,3591.42 4675,3626.96 ; U3B.12@4800,3255.11 4790.54,3264.57 4773.05,3264.57 4760.83,3276.79 4760.83,3276.93 4744.76,3293 4736.29,3293 4670.83,3358.45 4670.83,3622.8 4675,3626.96 ; U3B.12@4814.17,3259.84 4850.56,3259.84 4867.51,3242.89 4867.51,3200.02 4842.49,3175 4813.76,3175 4800.96,3187.8 4741.94,3187.8 4693,3236.75 4693,3263.25 4707,3277.25 4707,3293.91 4643.91,3357 4434.47,3357 4390.83,3313.36 4390.83,3256.27 4373.26,3238.7 4316.16,3238.7 4313.47,3236 4093.23,3236 4007,3322.23 4007,3347.68 3993.85,3360.84 3993.85,3520.64 4000,3526.8 4000,3579.29 3926.17,3653.12 3926.17,3677.28 3919.27,3677.28 3901.69,3694.86 3901.69,3701.76 3851.57,3751.88 U2.51@3851.57,3795.87 3851.57,3869.14 3795.71,3925 3621.89,3925 3464.89,3768 3355.95,3768 3299.26,3824.69 3294.03,3824.69 3275.28,3843.44 3275.28,3848.66 3158.79,3965.16 U3C.12@3097.21,3965.16 ; U3A.12@4814.17,4434.84 4777.79,4434.84 4715.69,4372.75 4715.69,3667.66 4675,3626.96
NetU2_89: U2.89 USB2.3 | length 148.3
  Top Layer w12: U2.89@4349.61,4195.47 4453.94,4195.47 USB2.3@4485.04,4164.37
NetU2_90: U2.90 USB2.2 | length 307.3
  Top Layer w12: U2.90@4349.61,4215.16 4495.76,4215.16 4528.54,4182.39 4528.54,4129.13 USB2.2@4485.04,4085.63
NetU2_130: U2.130 U11.12 | length 392.8
  Top Layer w12: v1(3825,4325) 3825,4525 3851.57,4551.57 U2.130@3851.57,4654.13
  Bottom Layer w12: v1(3825,4325) 3825,4294.29 U11.12@3840.55,4278.74
NetU3A_21: U3A.21 U4A.4 | length 275.6
  Top Layer w12: U3A.21@5085.83,4537.2 5089.06,4533.97 5129.55,4533.97 5160.16,4503.36 5160.16,4437.28 5222.44,4375 U4A.4@5255.51,4375
NetU3A_22: U3A.22 U4A.2 | length 206.1
  Top Layer w12: U3A.22@5085.83,4562.8 5089.06,4559.56 5137.88,4559.56 5222.44,4475 U4A.2@5255.51,4475
NetU3A_23: U3A.23 U5A.4 | length 174.5
  Top Layer w12: U3A.23@5085.83,4588.39 5185.83,4588.39 5197.44,4600 U5A.4@5255.51,4600
NetU3A_24: U3A.24 U5A.2 | length 208.3
  Top Layer w12: U3A.24@5085.83,4613.98 5144.15,4613.98 5199.16,4668.99 5199.16,4674.15 5225.02,4700 U5A.2@5255.51,4700
NetU3A_25: U3A.25 U6A.4 | length 288.7
  Top Layer w12: U3A.25@5085.83,4639.57 5142.16,4639.57 5179.66,4677.07 5179.66,4682.22 5191.94,4694.5 5191.94,4761.43 U6A.4@5255.51,4825
NetU3A_26: U3A.26 U6A.2 | length 372.8
  Top Layer w12: U3A.26@5085.83,4665.16 5086.66,4664.32 5139.34,4664.32 5160.16,4685.15 5160.16,4699 5172.44,4711.28 5172.44,4859.22 5213.53,4900.31 5230.82,4900.31 U6A.2@5255.51,4925
NetU3B_21: U3B.21 U4B.4 | length 275.6
  Top Layer w12: U3B.21@5085.83,3362.2 5089.06,3358.97 5129.55,3358.97 5160.16,3328.36 5160.16,3262.28 5222.44,3200 U4B.4@5255.51,3200
NetU3B_22: U3B.22 U4B.2 | length 206.1
  Top Layer w12: U3B.22@5085.83,3387.79 5089.06,3384.56 5137.88,3384.56 5222.44,3300 U4B.2@5255.51,3300
NetU3B_23: U3B.23 U5B.4 | length 174.5
  Top Layer w12: U3B.23@5085.83,3413.39 5185.83,3413.39 5197.44,3425 U5B.4@5255.51,3425
NetU3B_24: U3B.24 U5B.2 | length 208.3
  Top Layer w12: U3B.24@5085.83,3438.98 5144.15,3438.98 5199.16,3493.99 5199.16,3499.15 5225.02,3525 U5B.2@5255.51,3525
NetU3B_25: U3B.25 U6B.4 | length 288.7
  Top Layer w12: U3B.25@5085.83,3464.57 5142.16,3464.57 5179.66,3502.07 5179.66,3507.22 5191.94,3519.5 5191.94,3586.43 U6B.4@5255.51,3650
NetU3B_26: U3B.26 U6B.2 | length 372.8
  Top Layer w12: U3B.26@5085.83,3490.16 5086.66,3489.32 5139.34,3489.32 5160.16,3510.15 5160.16,3524 5172.44,3536.28 5172.44,3684.22 5213.53,3725.31 5230.82,3725.31 U6B.2@5255.51,3750
NetU3C_21: U3C.21 U4C.4 | length 275.6
  Top Layer w12: U4C.4@2619.49,4025 2652.56,4025 2689,3988.56 2689,3922.47 2745.45,3866.03 2785.94,3866.03 U3C.21@2789.17,3862.8
NetU3C_22: U3C.22 U4C.2 | length 206.1
  Top Layer w12: U4C.2@2619.49,3925 2652.56,3925 2737.12,3840.44 2785.94,3840.44 U3C.22@2789.17,3837.21
NetU3C_23: U3C.23 U5C.4 | length 174.5
  Top Layer w12: U5C.4@2619.49,3800 2677.56,3800 2689.17,3811.61 U3C.23@2789.17,3811.61
NetU3C_24: U3C.24 U5C.2 | length 208.3
  Top Layer w12: U5C.2@2619.49,3700 2649.98,3700 2675.84,3725.85 2675.84,3731.01 2730.85,3786.02 U3C.24@2789.17,3786.02
NetU3C_25: U3C.25 U6C.4 | length 288.7
  Top Layer w12: U6C.4@2619.49,3575 2683.06,3638.57 2683.06,3705.5 2695.34,3717.78 2695.34,3722.93 2732.84,3760.43 U3C.25@2789.17,3760.43
NetU3C_26: U3C.26 U6C.2 | length 372.8
  Top Layer w12: U6C.2@2619.49,3475 2644.18,3499.69 2661.47,3499.69 2702.56,3540.78 2702.56,3688.72 2714.84,3701 2714.84,3714.85 2735.66,3735.68 2788.34,3735.68 U3C.26@2789.17,3734.84
NetU3D_21: U3D.21 U4D.4 | length 275.6
  Top Layer w12: U4D.4@2619.49,5200 2652.56,5200 2714.84,5137.72 2714.84,5071.64 2745.45,5041.03 2785.94,5041.03 U3D.21@2789.17,5037.8
NetU3D_22: U3D.22 U4D.2 | length 206.1
  Top Layer w12: U4D.2@2619.49,5100 2652.56,5100 2737.12,5015.44 2785.94,5015.44 U3D.22@2789.17,5012.2
NetU3D_23: U3D.23 U5D.4 | length 174.5
  Top Layer w12: U5D.4@2619.49,4975 2677.56,4975 2689.17,4986.61 U3D.23@2789.17,4986.61
NetU3D_24: U3D.24 U5D.2 | length 208.3
  Top Layer w12: U5D.2@2619.49,4875 2649.98,4875 2675.84,4900.85 2675.84,4906.01 2730.85,4961.02 U3D.24@2789.17,4961.02
NetU3D_25: U3D.25 U6D.4 | length 288.7
  Top Layer w12: U6D.4@2619.49,4750 2683.06,4813.57 2683.06,4880.5 2695.34,4892.78 2695.34,4897.93 2732.84,4935.43 U3D.25@2789.17,4935.43
NetU3D_26: U3D.26 U6D.2 | length 372.8
  Top Layer w12: U6D.2@2619.49,4650 2644.18,4674.69 2661.47,4674.69 2702.56,4715.78 2702.56,4863.72 2714.84,4876 2714.84,4889.85 2735.66,4910.68 2788.34,4910.68 U3D.26@2789.17,4909.84
USB0_VBUS: R1.2 R4.1 U2.21 USB1.1 | length 1322.1
  Top Layer w12: R1.2@3400,4145.47 3430.32,4175.79 U2.21@3491.34,4175.79 3587.9,4175.79 3643,4230.89 3643,4303.17 3632,4314.17 3632,4522.75 3618,4536.75 3618,4550.47 3553.75,4614.72 3553.75,4688.63 3587.99,4722.88 3587.99,4875 ; USB1.1@3587.99,5090.94 3587.99,4875 ; R4.1@3720.47,4875 3587.99,4875
V3.3: C3A.2 C3B.2 C3C.2 C3D.2 C4A.2 C4B.2 C4C.2 C4D.2 C16.2 D3A.1 D3B.1 D3C.1 D3D.1 D4A.1 D4B.1 D4C.1 D4D.1 R11A.1 R11B.1 R11C.1 R11D.1 U3A.13 U3A.28 U3B.13 U3B.28 U3C.13 U3C.28 U3D.13 U3D.28 U8.3 | length 9385.5
  Top Layer w12: U3C.28@2789.17,3683.66 2883.66,3683.66 2975,3775 v1(2975,3825) ; U3C.28@2798.03,3674.81 2798.03,3507.09 C4C.2@2855.12,3450 R11C.1@2973.03,3450 ; v1(2925,5000) 2925,4956.11 2818.69,4849.81 2798.03,4849.81 2798.03,4682.09 C4D.2@2855.12,4625 R11D.1@2973.03,4625 ; v1(2975,5150) 2990.75,5165.75 U3D.13@3060.83,5165.75 3097.22,5165.75 3114.17,5182.7 3114.17,5245.87 C3D.2@3085.04,5275 ; v1(2982,3982) 2990.75,3990.75 U3C.13@3060.83,3990.75 ; U8.3@3779.53,3288.54 U8.3@3779.53,3313.38 ; v1(3950,3325) 3952.52,3325 4077.52,3200 4328.38,3200 4331.08,3202.7 4388.17,3202.7 4426.83,3241.36 4426.83,3298.45 4449.38,3321 4629,3321 4629,3249.83 4727.03,3151.8 4763.16,3151.8 C3B.2@4789.96,3125 ; v1(4725,3250) 4740.75,3234.25 U3B.13@4814.17,3234.25 ; U3A.13@4777.79,4409.25 U3A.13@4814.17,4409.25 v1(4884.25,4409.25) ; v1(4884.25,4559.25) 5041.34,4716.34 U3A.28@5085.83,4716.34 U3A.28@5077.16,4725 ; R11B.1@4901.97,3775 C4B.2@5019.88,3775 5076.97,3717.91 U3B.28@5076.97,3550.19 ; R11A.1@4901.97,4950 C4A.2@5019.88,4950 5076.97,4892.91 D4A.1@5076.97,4875 D3A.1@5076.97,4800 U3A.28@5076.97,4725.19 ; v1(4975,3550) 5000,3550 5008.66,3541.34 U3B.28@5085.83,3541.34
  Top Layer w20: C16.2@3925,3400 3925,3350 v1(3950,3325)
  Top Layer w25: v1(3050,4175) 3085.04,4139.96 C3C.2@3085.04,4100 ; v1(4775,4250) 4775,4285.04 C3A.2@4789.96,4300
  Top Layer w30: v1(3705.48,3425) U8.3@3779.53,3350.96 ; U8.3@3779.53,3313.38 U8.3@3779.53,3350.96 ; C16.2@3925,3400 3828.57,3400 U8.3@3779.53,3350.96
  Bottom Layer w12: v1(2925,5000) 2925,5100 v1(2975,5150) ; 2977,3852.46 2982,3857.46 v1(2982,3982) ; v1(4725,3250) 4725,3329 4850,3454 ; v1(4884.25,4409.25) v1(4884.25,4559.25)
  Bottom Layer w20: v1(3950,3325) 4198.63,3325 4327.63,3454 4850,3454 4878.53,3454 4882.53,3450 4900,3450
  Bottom Layer w25: v1(2925,4625) 2977,4573 2977,4175 v1(3050,4175) ; v1(2975,3825) 2975,3850.46 2977,3852.46 ; v1(4775,4250) 4796.47,4271.47 ; v1(4884.25,4409.25) 4796.47,4321.47 4796.47,4300 4796.47,4271.47 ; 4900,3450 5000,3550 4796.47,3753.53 4796.47,4271.47
  Bottom Layer w30: 2977,3852.46 2977,4175 ; v1(2982,3982) 3343,3982 3705.48,3619.52 v1(3705.48,3425) v1@3699.59,3425
V3.3MCU: C1.2 C17.2 C19.2 C20.2 C21.2 C22.2 C23.2 C25.1 D1.1 D2.1 R8.1 R32.2 R33.2 R34.2 R35.2 R36.2 U1.5 U2.5 U2.16 U2.17 U2.25 U2.36 U2.41 U2.59 U2.71 U2.77 U2.94 U2.107 U2.111 U2.127 U2.131 U2.137 U2.141 U9.3 U11.8 U11.13 | length 8773.8
  Top Layer w12: D2.1@3325,3929.53 D1.1@3325,3995.47 ; U2.36@3481.14,3878.15 U2.36@3491.34,3878.15 ; C20.2@3577.56,3700 R8.1@3645.47,3700 3655.21,3709.74 3655.21,3797.34 U2.41@3654.72,3797.83 ; U2.41@3654.72,3795.87 U2.41@3654.72,3797.83 ; v1(3775,3875) v1(3650,3875) 3650,3850 3654.72,3845.28 U2.41@3654.72,3797.83 ; v1(3925,4375) 3925,4475 3925,4525 3975,4575 ; C1.2@4172.44,4927.56 C1.2@4175,4927.56 ; U2.71@4245.28,3795.87 4245.28,3830.74 4250,3835.47 4250,3842.73 4250,3850 ; v1(4275,4025) 4275,4001.53 4317.28,3959.25 U2.77@4349.61,3959.25 4393.47,3959.25 4454.72,3898.01 4454.72,3777.16 C21.2@4425,3747.44 ; 4275,4825 4300,4825 4340.94,4825 U9.3@4350,4834.06 U9.3@4325.16,4834.06 ; U2.107@4349.61,4549.8 4349.8,4550 U2.107@4350,4550 ; U2.94@4350,4296.07 4384.1,4296.07 4391.13,4303.1 4391.13,4420.66 4443,4472.53 4443,4513.25 4484.27,4554.53 R35.2@4525,4554.53 ; v1(4525,4600) R35.2@4525,4554.53 ; R34.2@4600,4554.53 R35.2@4525,4554.53
  Top Layer w14: D2.1@3325,3929.53 3294.28,3898.81 3294.28,3851.31 3301.9,3843.69 3456.88,3843.69 U2.36@3491.34,3878.15 3522.71,3878.15 3575,3930.44 v1(3575,4025) 3575,4047.12 3525.08,4097.05 U2.25@3491.34,4097.05 ; U2.5@3491.34,4490.75 3525.08,4490.75 3575,4440.83 3575,4324.14 3525.08,4274.21 U2.16@3491.34,4274.21 U2.17@3491.34,4254.53 3554.53,4254.53 v1(3575,4275) ; 3732.76,4600 3811.49,4600 3831.89,4620.4 U2.131@3831.89,4654.13 3831.89,4701.48 3852.56,4722.15 C22.2@3852.56,4725 ; 3910.63,4618.98 U2.127@3910.63,4654.13 3910.63,4689.29
  Top Layer w16: U2.141@3635.04,4654.13 3635.04,4618.98 3654.02,4600 3694.8,4600 3713.78,4618.98 ; R36.2@3725,4720.47 3725,4700.51 3713.78,4689.29 U2.137@3713.78,4654.13 3713.78,4618.98 ; 3732.76,4600 3713.78,4618.98 ; C22.2@3852.56,4725 3874.92,4725 3910.63,4689.29 ; 3910.63,4618.98 3954.61,4575 3975,4575 4181.61,4575 4225.59,4618.98 ; 4002.56,3725 4009.06,3731.5 U2.59@4009.06,3795.87 4009.06,3831.02 4078.04,3900 ; v1(4050,3900) 4078.04,3900 ; 4238.27,4750 4225.59,4737.32 U2.111@4225.59,4654.13 4225.59,4618.98 ; 4250,3842.73 4192.73,3900 4078.04,3900 ; U2.107@4349.61,4549.8 4294.77,4549.8 4225.59,4618.98
  Top Layer w30: 3925,4475 v1(3950,4475) ; U1.5@4100,5000 C1.2@4172.44,4927.56 ; C1.2@4175,4927.56 v1(4175,4975) ; v1(4250,4850) 4275,4825 ; 4300,4825 4238.27,4763.27 4238.27,4750 4263.27,4725 4400.2,4725 C17.2@4436.62,4688.58
  Bottom Layer w12: v1(3575,4025) 3575,3950 v1(3650,3875) ; C23.2@3770.28,4339.37 3787.91,4357 3838.25,4357 3871.06,4324.19 U11.13@3871.06,4323.34 ; v1(3775,3875) 4025,3875 v1(4050,3900) 4220.25,3900 4282,3961.75 4282,4018 v1(4275,4025) ; U11.8@3840.55,4200 3826.47,4200 3813.79,4187.32 3813.79,4120.86 C25.1@3847.84,4086.81 3859.65,4075 R32.2@4020.47,4075 ; U11.13@3871.06,4309.25 U11.13@3871.06,4323.34 ; v1(3925,4375) 3922.72,4375 U11.13@3871.06,4323.34 ; R33.2@4020.47,4000 R32.2@4020.47,4075 ; 4020.47,4095.47 R32.2@4020.47,4075
  Bottom Layer w14: v1(3575,4025) 3608,4058 3608,4242 v1(3575,4275)
  Bottom Layer w16: R33.2@4020.47,4000 4050,3970.47 v1(4050,3900)
  Bottom Layer w30: v1(3575,4025) 3567.02,4025 3359,4233.02 3359,4266.98 3467.02,4375 3675,4375 3773,4473 3948,4473 v1(3950,4475) 4050,4475 4191,4334 4266.98,4334 4291,4358.02 4291,4373.98 4517.02,4600 v1(4525,4600) ; v1(4175,4975) 4250,4900 v1(4250,4850)
V5_USB_OUT: C18.2 U10.3 USB2.1 | length 1035.6
  Top Layer w30: C18.2@4077.56,3477.56 4158.05,3477.56 ; v1(4158.05,3433.05) 4158.05,3477.56 ; U10.3@4282.09,3315.94 4282.09,3353.52 4158.05,3477.56
  Bottom Layer w30: v1(4158.05,3433.05) 4171.8,3433.05 4485.04,3746.29 USB2.1@4485.04,3987.2
VBATT: BATT.1 C5A.2 C5B.2 C5C.2 C5D.2 C6A.2 C6B.2 C6C.2 C6D.2 C7A.2 C7B.2 C7C.2 C7D.2 C13.2 C14.2 C15.2 R6.1 T1A.5 T1A.6 T1B.5 T1B.6 T1C.5 T1C.6 T1D.5 T1D.6 T2A.5 T2A.6 T2B.5 T2B.6 T2C.5 T2C.6 T2D.5 T2D.6 T3A.5 T3A.6 T3B.5 T3B.6 T3C.5 T3C.6 T3D.5 T3D.6 U4A.6 U4B.6 U4C.6 U4D.6 U5A.6 U5B.6 U5C.6 U5D.6 U6A.6 U6B.6 U6C.6 U6D.6 U7A.5 U7B.5 U7C.5 U7D.5 U8.1 U8.4 U9.1 U9.4 U10.4 | length 19967.1
  Top Layer w12: v1(2600,4175) 2632,4207 3118,4207 v1(3125,4200) ; v1(3275,4150) 3279.53,4145.47 R6.1@3325,4145.47
  Top Layer w25: T3C.6@2132.48,3525 T3C.5@2132.48,3575 2189.88,3632.4 2189.88,3702.79 2188.38,3704.29 2188.38,3714.68 2153.06,3750 T2C.6@2132.48,3750 T2C.5@2132.48,3800 2189.88,3857.4 2189.88,3938.18 2153.06,3975 T1C.6@2132.48,3975 T1C.5@2132.48,4025 2132.48,4060.04 C6C.2@2172.44,4100 2172.44,4093.37 2203.53,4062.28 2368.91,4062.28 2400,4093.37 2436.56,4056.81 2475.18,4056.81 2493.82,4038.18 2493.82,4011.82 U4C.6@2456.99,3975 ; T3D.6@2132.48,4700 T3D.5@2132.48,4750 2189.88,4807.4 ; v1(2217.6,4807.4) 2189.88,4807.4 ; U5C.6@2430.51,3750 U5C.6@2456.99,3750 ; U4C.6@2430.51,3975 U4C.6@2456.99,3975 ; U5D.6@2430.51,4925 U5D.6@2456.99,4925 ; U4D.6@2430.51,5150 U4D.6@2456.99,5150 ; v1(2448.03,4525) 2500,4525 ; v1(2475,3375) 2495.47,3375 C7C.2@2511.52,3358.96 ; 2502.56,3350 C7C.2@2511.52,3358.96 ; 2502.56,4525 2516.5,4538.94 2516.5,4640.5 U6D.6@2457,4700 ; C7C.2@2520.47,3350 C7C.2@2511.52,3358.96 ; v1(2598.03,4300) 2598.03,4340.35 U7D.5@2610.43,4352.76 ; v1(2600,3125) 2600,3167.32 U7C.5@2610.43,3177.76 ; C14.2@3575,3400 U8.1@3661.42,3313.58 ; U8.1@3661.42,3347.42 U8.1@3661.42,3313.58 ; U8.4@3838.58,3347.42 U8.4@3838.58,3313.38 ; 3975,3250.2 3901.77,3250.2 U8.4@3838.58,3313.38 ; U10.4@4341.14,3281.91 U10.4@4341.14,3315.94 U10.4@4341.14,3341.14 ; v1(4350,3400) 4341.14,3391.14 U10.4@4341.14,3341.14 ; U9.4@4350,4775 4384.04,4775 4415.74,4806.71 4415.74,4920.46 4384.04,4952.17 U9.1@4350.2,4952.17 ; U9.1@4350,4952.17 U9.1@4350.2,4952.17 ; C13.2@4427.56,3427.56 U10.4@4341.14,3341.14 ; v1(4436.62,4988.38) C15.2@4436.62,5038.58 U9.1@4350.2,4952.17 ; U7B.5@5264.57,4047.24 5276.97,4059.65 v1(5276.97,4100) ; U7A.5@5264.57,5222.25 5276.97,5234.65 v1(5276.97,5275) ; 5372.44,3875 5358.5,3861.06 5358.5,3759.5 U6B.6@5418,3700 ; 5372.44,5050 5358.5,5036.06 5358.5,4934.5 U6A.6@5418,4875 ; 5375,3875 v1(5426.97,3875) ; 5375,5050 v1(5426.97,5050) ; U4B.6@5444.49,3250 U4B.6@5418.01,3250 ; U5B.6@5444.49,3475 U5B.6@5418.01,3475 ; U4A.6@5444.49,4425 U4A.6@5418.01,4425 ; U5A.6@5444.49,4650 U5A.6@5418.01,4650 ; v1(5700,4225) 5700,4297.44 C6A.2@5702.56,4300 ; T3B.6@5742.52,3700 T3B.5@5742.52,3650 5685.12,3592.6 5685.12,3522.21 5686.62,3520.71 5686.62,3510.32 5721.94,3475 T2B.6@5742.52,3475 T2B.5@5742.52,3425 5685.12,3367.6 5685.12,3286.82 5721.94,3250 T1B.6@5742.52,3250 T1B.5@5742.52,3200 5742.52,3164.96 C6B.2@5702.56,3125 5702.56,3131.63 5671.47,3162.72 5512.72,3162.72 C5B.2@5475,3125 5475,3131.63 5438.44,3168.19 5399.82,3168.19 5381.18,3186.82 5381.18,3213.18 U4B.6@5418.01,3250 ; T3A.6@5742.52,4875 T3A.5@5742.52,4825 5685.12,4767.6 5685.12,4697.21 5686.62,4695.71 5686.62,4685.32 5721.94,4650 T2A.6@5742.52,4650 T2A.5@5742.52,4600 5685.12,4542.6 5685.12,4461.82 5721.94,4425 T1A.6@5742.52,4425 T1A.5@5742.52,4375 5742.52,4339.96 C6A.2@5702.56,4300 ; 2189.88,4807.4 2189.88,4877.79 2188.38,4879.29 2188.38,4889.68 2153.06,4925 T2D.6@2132.48,4925 T2D.5@2132.48,4975 2189.88,5032.4 2189.88,5113.18 2153.06,5150 T1D.6@2132.48,5150 T1D.5@2132.48,5200 2132.48,5235.04 C6D.2@2172.44,5275 2172.44,5268.37 2203.53,5237.28 2362.28,5237.28 C5D.2@2400,5275 2400,5268.37 2436.56,5231.81 2475.18,5231.81 2493.82,5213.18 2493.82,5186.82 U4D.6@2456.99,5150 ; U6C.6@2433.47,3525 U6C.6@2457,3525 ; U6C.6@2433.47,3525 U6C.6@2430.51,3525 2430.51,3527.95 U6C.6@2433.47,3525 ; U6D.6@2433.47,4700 U6D.6@2457,4700 ; U6D.6@2433.47,4700 U6D.6@2430.51,4700 2430.51,4702.95 U6D.6@2433.47,4700 ; U6C.6@2457,3525 2516.5,3465.5 2516.5,3363.94 C7C.2@2511.52,3358.96 ; U6C.6@2457,3525 2493.82,3561.82 2493.82,3713.17 U5C.6@2456.99,3750 ; U5C.6@2456.99,3750 2493.82,3786.82 2493.82,3938.18 U4C.6@2456.99,3975 ; U6D.6@2457,4700 2493.82,4736.82 2493.82,4888.17 U5D.6@2456.99,4925 ; U5D.6@2456.99,4925 2493.82,4961.82 2493.82,5113.18 U4D.6@2456.99,5150 ; U8.1@3661.42,3313.58 U8.1@3661.42,3313.38 3661.42,3279.35 3693.12,3247.64 3806.88,3247.64 3838.58,3279.35 U8.4@3838.58,3313.38 ; U4B.6@5418.01,3250 5381.18,3286.82 5381.18,3438.18 U5B.6@5418.01,3475 ; U5B.6@5418.01,3475 5381.18,3511.83 5381.18,3663.18 U6B.6@5418,3700 ; U6B.6@5418,3700 U6B.6@5441.53,3700 ; U4A.6@5418.01,4425 5381.18,4388.18 5381.18,4361.82 5399.82,4343.19 5438.44,4343.19 5475,4306.63 C5A.2@5475,4300 5512.72,4337.72 5671.47,4337.72 5702.56,4306.63 C6A.2@5702.56,4300 ; U4A.6@5418.01,4425 5381.18,4461.82 5381.18,4613.18 U5A.6@5418.01,4650 ; U5A.6@5418.01,4650 5381.18,4686.83 5381.18,4838.18 U6A.6@5418,4875 ; U6A.6@5418,4875 U6A.6@5441.53,4875 ; U6B.6@5441.53,3700 U6B.6@5444.49,3700 5444.49,3697.05 U6B.6@5441.53,3700 ; U6A.6@5441.53,4875 U6A.6@5444.49,4875 5444.49,4872.05 U6A.6@5441.53,4875
  Top Layer w40: T1B.5@5742.52,3200 5750,3192.52 v1(5750,3150)
  Top Layer w50: C6C.2@2172.44,4100 2172.44,4122.19 2234.97,4184.72 2443.5,4184.72 2453.22,4175 v1(2600,4175) ; 3975,3250.2 3975,3250 v1(4000,3225)
  Bottom Layer w12: v1(3125,4200) 3175,4150 v1(3275,4150)
  Bottom Layer w25: v1(2475,3375) 2475,3250 v1(2600,3125) ; 4350,3200 v1(4350,3400) ; v1(4436.62,4988.38) 4561.5,4863.5 4840.95,4863.5 5069.49,4634.96 5069.49,4225 ; v1(5276.97,4100) 5276.97,4025 v1(5426.97,3875) ; v1(5276.97,5275) 5276.97,5200 v1(5426.97,5050)
  Bottom Layer w50: v1(2217.6,4807.4) 2448.03,4576.97 v1(2448.03,4525)
  Bottom Layer w100: v1(2448.03,4525) 2598.03,4375 v1(2598.03,4300) 2598.03,3976.97 2895.66,3679.34 ; 2900,3675 2974,3601 2974,3593.52 3242.52,3325 ; BATT.1@3350,3325 3242.52,3325 ; BATT.1@3400,3325 3400,3232.48 3367.52,3200 ; v1(5700,4225) 5069.49,4225 4900.97,4056.48 4900.97,3868.52 5225,3544.49 5225,3200 ; v1(5750,3150) 5275,3150 5225,3200 ; 3242.52,3325 3367.52,3200 ; 3367.52,3200 3825,3200 4350,3200 4376,3174 5199,3174 5225,3200
pads on no net: U2.1 U2.3 U2.6 U2.7 U2.8 U2.9 U2.10 U2.11 U2.14 U2.15 U2.24 U2.26 U2.27 U2.28 U2.29 U2.30 U2.31 U2.33 U2.35 U2.37 U2.38 U2.39 U2.44 U2.45 U2.46 U2.47 U2.48 U2.49 U2.54 U2.57 U2.58 U2.60 U2.61 U2.63 U2.64 U2.65 U2.66 U2.67 U2.68 U2.69 U2.70 U2.72 U2.73 U2.74 U2.78 U2.79 U2.80 U2.82 U2.83 U2.84 U2.85 U2.86 U2.91 U2.95 U2.96 U2.97 U2.99 U2.100 U2.101 U2.103 U2.104 U2.105 U2.106 U2.108 U2.110 U2.112 U2.113 U2.114 U2.115 U2.116 U2.117 U2.120 U2.125 U2.126 U2.129 U2.132 U2.133 U2.134 U2.136 U2.138 U2.139 U2.140 U2.142 U2.143 U2.144 U3A.14 U3A.15 U3A.16 U3B.14 U3B.15 U3B.16 U3C.14 U3C.15 U3C.16 U3D.14 U3D.15 U3D.16 U4A.1 U4A.8 U4B.1 U4B.8 U4C.1 U4C.8 U4D.1 U4D.8 U5A.1 U5A.8 U5B.1 U5B.8 U5C.1 U5C.8 U5D.1 U5D.8 U6A.1 U6A.8 U6B.1 U6B.8 U6C.1 U6C.8 U6D.1 U6D.8 U8.2 U9.2 U10.2 U11.2 U11.3 U11.4 U11.5 U11.6 U11.7 U11.14 U11.15 U11.16 U11.17 U11.19 U11.21 U11.22 U11.25 USB1.6 USB1.7 USB1.8 USB1.9 USB1.MH1 USB1.MH2 USB2.5 USB2.6

## Polygon pours and split planes (outlines as drawn)
GND on Bottom Layer "gnd_plane" (solid, remove dead copper, pour order 5): 2000,5400 2000,3025 2000,3000 5875,3000 5875,5400

## Other copper
Top Layer:
  rectangle net M1D: 2025,5025 2150,5125
  rectangle net M2D: 2025,4800 2150,4900
  rectangle net M3D: 2025,4575 2150,4675
  rectangle net M1C: 2025,3850 2150,3950
  rectangle net M2C: 2025,3625 2150,3725
  rectangle net M3C: 2025,3400 2150,3500
  rectangle net M3B: 5725,3725 5850,3825
  rectangle net M2B: 5725,3500 5850,3600
  rectangle net M1B: 5725,3275 5850,3375
  rectangle net M1A: 5725,4450 5850,4550
  rectangle net M2A: 5725,4675 5850,4775
  rectangle net M3A: 5725,4900 5850,5000

## Silkscreen, mask and mechanical layers (free items; w line width, h text height)
Top Overlay:
  text "Quadrotor" at 3800,5175 h100
  text "George Hotz & Kylie Fisher" at 3300,3125 h50
  text "CMU BUILD18 2013" at 3900,3050 h50
Top Solder:
  rectangle: 2025,4575 2150,4675
  rectangle: 2025,4800 2150,4900
  rectangle: 2025,5025 2150,5125
  rectangle: 2025,3850 2150,3950
  rectangle: 2025,3625 2150,3725
  rectangle: 2025,3400 2150,3500
  rectangle: 5725,3275 5850,3375
  rectangle: 5725,3500 5850,3600
  rectangle: 5725,3725 5850,3825
  rectangle: 5725,4450 5850,4550
  rectangle: 5725,4675 5850,4775
  rectangle: 5725,4900 5850,5000

## Text inside footprints (layer, text, board x,y; h text height)
USB1: Mechanical 1 "PCB Edge" at 3683.91,5417.02 h9.84 r180